# Altium PCB STM32.PcbDoc (part 6 of 6)
Units mm, origin at the board's own origin, x right, y up, seen from the top; angles counter-clockwise.
Board outline 99.69 x 99.7 mm, 2 copper layers (Top Layer, Bottom Layer); 150 components, 142 nets, 668 pads, 273 vias.
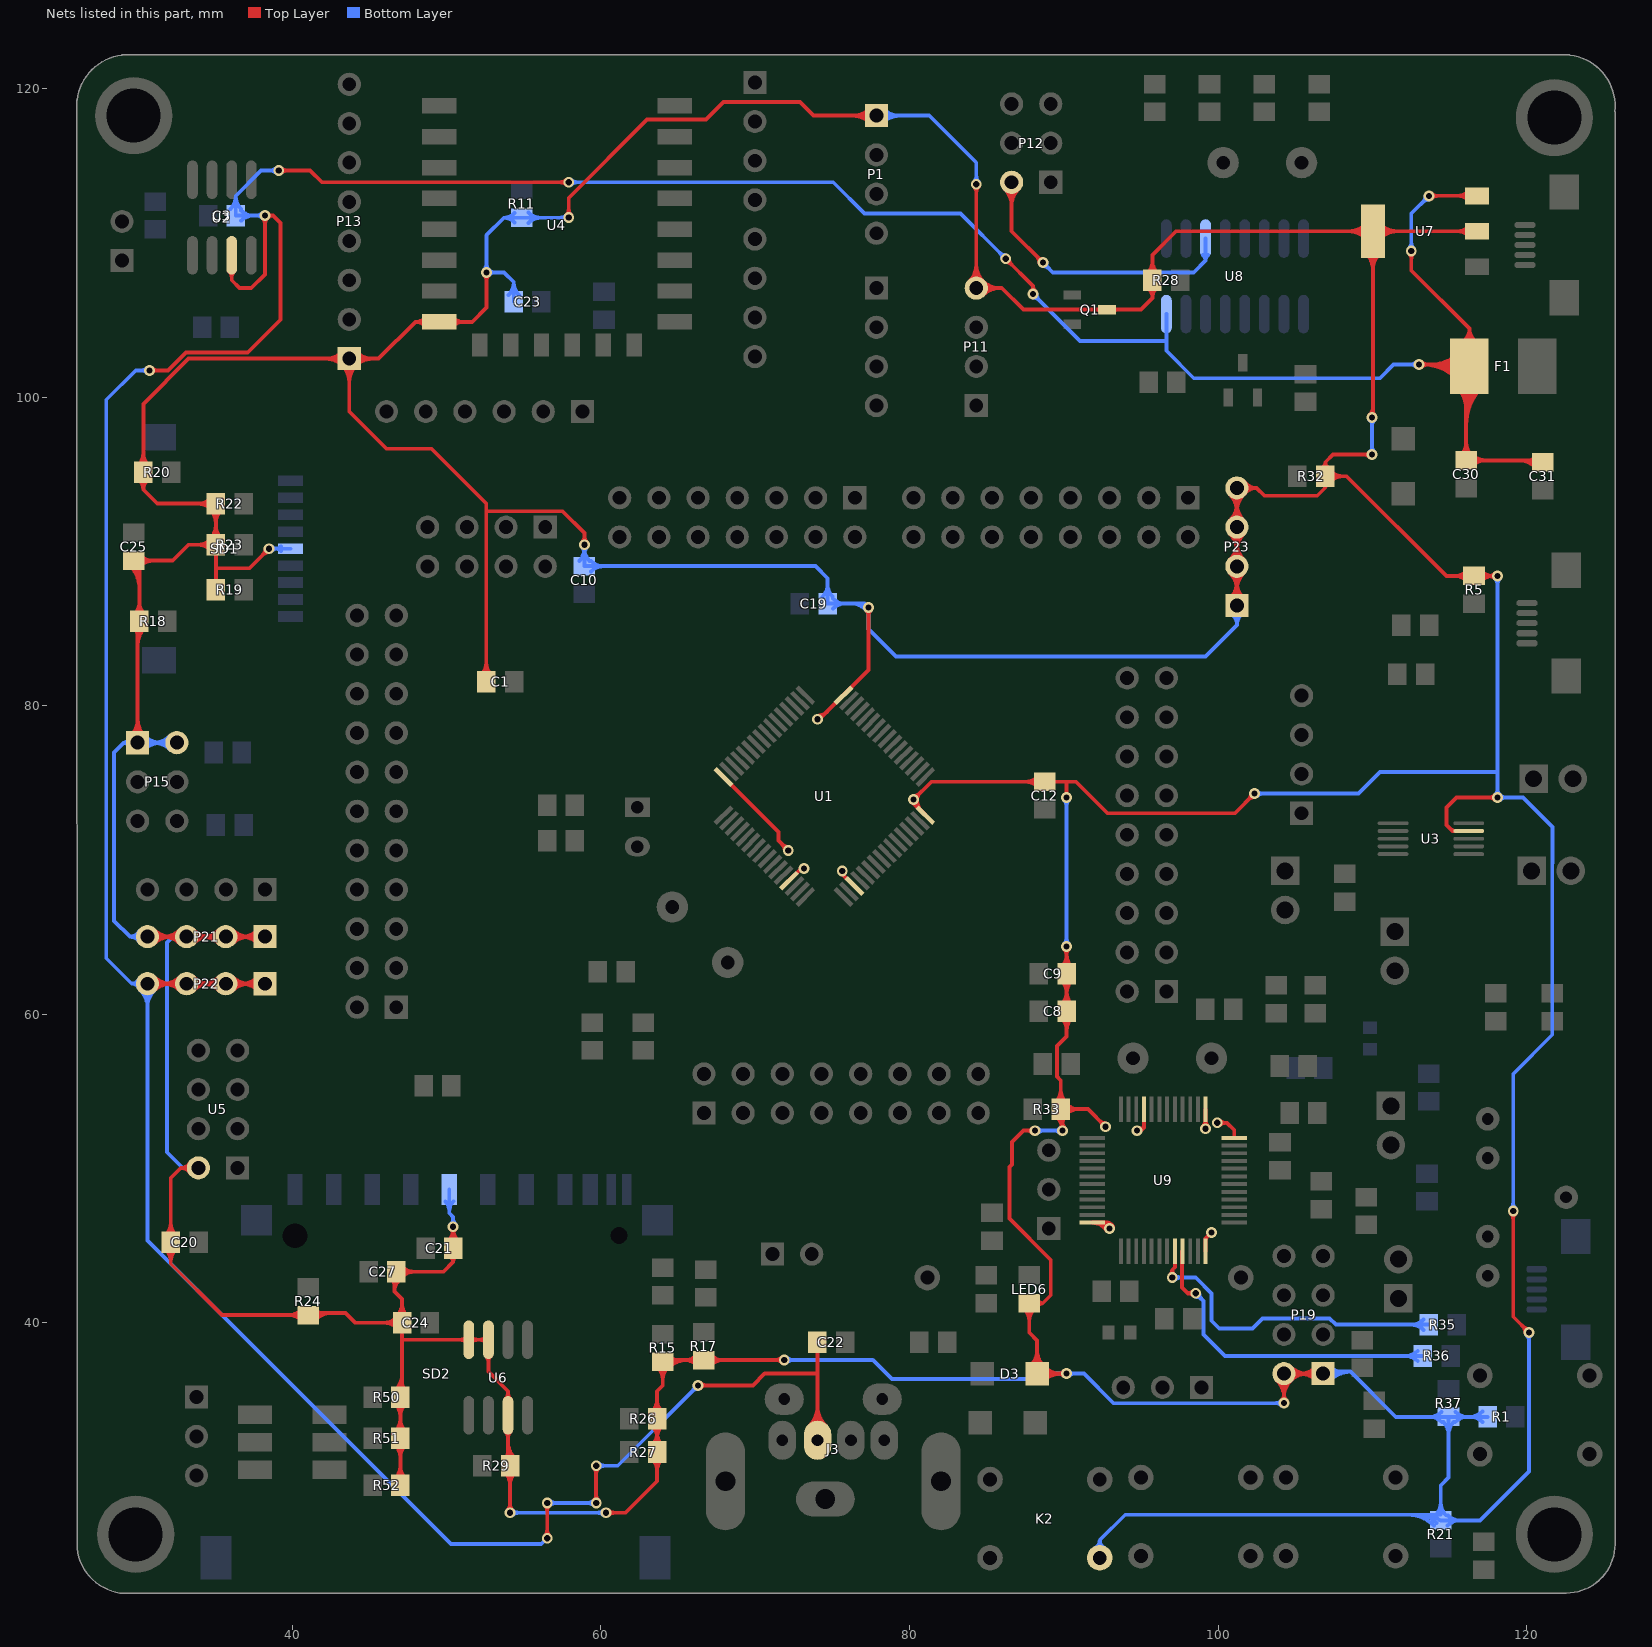
[diagram p6: the nets of this part, all layers, seen from the top]

## Via types
v1: diameter 0.7, hole 0.4, Top Layer to Bottom Layer, 272 vias
v2: diameter 1.27, hole 0.711, Top Layer to Bottom Layer, 1 vias

## Nets (pads, with @x,y where several pads share a name; then routed paths per layer and width w, separated by ;. In a path a pad name is that pad's centre, name@x,y a point inside that pad or via, vN(x,y) a via of type N, cw(c..) or ccw(c..) an arc to the next point about the centre after c; other vN are vias at no path point) (continued)
TXD: P12.2 U8.3 | length 24.9
  Top Layer w0.25: P12.2@86.172,113.477 cw(c85.105,112.41) 86.614,112.41 cw(c88.123,112.41) P12.2@87.056,113.477 ; P12.2@86.349,113.654 cw(c85.709,113.014) 86.614,113.014 cw(c87.519,113.014) P12.2@86.879,113.654 ; P12.2@86.614,113.919 86.614,110.744 v1(88.646,108.712) ; v1@88.421,108.712 ccw(c87.878,108.712) 88.262,109.096 ccw(c88.646,109.48) v1@88.646,108.937
  Bottom Layer w0.25: v1@88.646,108.487 cw(c88.646,107.944) 89.03,108.328 cw(c89.414,108.712) v1@88.871,108.712 ; v1(88.646,108.712) 89.281,108.077 98.425,108.077 99.187,108.839 ; U8.3@99.03,109.212 cw(c98.666,108.839) 99.187,108.839 ; U8.3@99.187,110.273 99.187,108.839 ; U8.3@99.344,109.212 ccw(c99.708,108.839) 99.187,108.839
USB_DM: R35.2 U9.32 | length 24.7
  Top Layer w0.254: v1@96.877,43.09 ccw(c96.561,43.434) 97.028,43.434 ; v1(97.028,42.926) 97.028,43.434 ; v1@97.179,43.09 cw(c97.495,43.434) 97.028,43.434 ; U9.32@97.194,44.637 97.194,43.6 97.028,43.434
  Bottom Layer w0.254: v1(97.028,42.926) 98.552,42.926 99.568,41.91 99.568,40.132 100.076,39.624 102.235,39.624 102.883,40.272 107.233,40.272 107.628,39.878 R35.2@113.654,39.878 ; v1@97.186,42.768 cw(c97.566,42.388) 97.566,42.926 cw(c97.566,43.464) v1@97.186,43.084 ; R35.2@113.32,39.544 ccw(c112.512,38.736) 112.512,39.878 ccw(c112.512,41.02) R35.2@113.32,40.212
USB_DP: R36.2 U9.33 | length 24.4
  Top Layer w0.254: U9.33@97.663,44.606 97.663,42.291 98.044,41.91 ; v1@98.388,41.759 ccw(c98.044,41.443) 98.044,41.91 ; v1@98.388,42.061 cw(c98.044,42.377) 98.044,41.91 ; v1(98.552,41.91) 98.044,41.91
  Bottom Layer w0.254: v1@98.552,41.687 cw(c98.552,41.149) 98.933,41.529 cw(c99.313,41.91) v1@98.775,41.91 ; v1(98.552,41.91) 99.06,41.402 99.06,39.243 100.457,37.846 R36.2@113.273,37.846 ; R36.2@112.939,37.512 ccw(c112.131,36.704) 112.131,37.846 ccw(c112.131,38.988) R36.2@112.939,38.18
VCC: C1.1 C8.2 C9.2 C10.1 C12.1 C19.1 C20.2 C21.1 C23.1 C24.1 C25.1 C27.1 D3.1 K2.1 LED6.1 P1.1 P11.4 P13.1 P15.1 P15.2 P19.1 P19.2 P21.1 P21.2 P21.3 P21.4 P23.1 P23.2 P23.3 P23.4 Q1.3 R1.1 R5.1 R11.1 R15.1 R17.1 R18.1 R19.1 R20.1 R21.1 R22.1 R23.1 R24.1 R26.1 R27.1 R28.2 R29.1 R32.1 R33.2 R37.2 R50.1 R51.1 R52.1 SD1.4 SD2.4 U1.13 U1.19 U1.32 U1.48 U1.64 U3.9 U4.15 U5.2 U6.3 U6.7 U6.8 U7.2 U7.4 U9.1 U9.9 U9.24 U9.36 U9.48 | length 1012
  Top Layer w0.25: C25.1@29.482,89.061 cw(c28.019,87.598) 30.088,87.598 ; P15.1@29.53,78.039 ccw(c28.463,79.106) 29.972,79.106 ccw(c31.481,79.106) P15.1@30.414,78.039 ; C25.1@29.659,89.238 cw(c28.623,88.202) 30.088,88.202 ; P15.1@29.707,77.862 ccw(c29.067,78.502) 29.972,78.502 ccw(c30.877,78.502) P15.1@30.237,77.862 ; R18.1@29.752,85.035 cw(c29.221,84.504) 29.972,84.504 ; R18.1@29.752,85.907 ccw(c28.941,86.718) 30.088,86.718 ccw(c31.235,86.718) R18.1@30.424,85.907 ; C25.1@29.836,89.415 cw(c29.226,88.805) C25.1@30.088,88.805 ; P15.1@29.972,77.597 29.972,85.355 R18.1@30.088,85.471 30.088,89.027 C25.1@29.718,89.397 32.247,89.397 33.274,90.424 R23.1@35.041,90.424 ; 29.972,83.944 cw(c31.515,83.944) R18.1@30.424,85.035 ; 29.972,84.548 cw(c30.911,84.548) R18.1@30.247,85.212 ; R20.1@30.006,95.559 ccw(c29.195,96.37) 30.342,96.37 ccw(c31.489,96.37) R20.1@30.678,95.559 ; R20.1@30.033,94.662 cw(c29.459,93.991) 30.342,93.991 ; C25.1@30.154,89.061 cw(c30.965,88.25) 30.965,89.397 cw(c30.965,90.544) C25.1@30.154,89.733 ; P21.4@30.607,65.024 P21.3@33.147,65.024 P21.2@35.687,65.024 P21.1@38.227,65.024 ; R20.1@30.651,94.662 ccw(c31.226,93.991) 30.342,93.991 ; P21.4@30.872,64.759 cw(c31.512,64.119) 31.512,65.024 cw(c31.512,65.929) P21.4@30.872,65.289 ; P21.4@31.049,64.582 cw(c32.116,63.515) 32.116,65.024 cw(c32.116,66.533) P21.4@31.049,65.466 ; C20.2@31.784,44.776 cw(c30.973,43.965) 32.12,43.965 cw(c33.267,43.965) C20.2@32.456,44.776 ; C20.2@31.784,45.648 ccw(c30.973,46.459) 32.12,46.459 ccw(c33.267,46.459) C20.2@32.456,45.648 ; P21.3@32.705,64.582 ccw(c31.638,63.515) 31.638,65.024 ccw(c31.638,66.533) P21.3@32.705,65.466 ; P21.3@32.882,64.759 ccw(c32.242,64.119) 32.242,65.024 ccw(c32.242,65.929) P21.3@32.882,65.289 ; U5.2@33.383,49.701 ccw(c32.766,49.305) 32.766,50.038 ; U5.2@33.383,50.375 cw(c32.766,50.771) 32.766,50.038 ; P21.3@33.412,64.759 cw(c34.052,64.119) 34.052,65.024 cw(c34.052,65.929) P21.3@33.412,65.289 ; P21.3@33.589,64.582 cw(c34.656,63.515) 34.656,65.024 cw(c34.656,66.533) P21.3@33.589,65.466 ; U5.2@33.909,50.038 32.766,50.038 ; R23.1@34.705,90.088 ccw(c33.894,89.277) 33.894,90.424 ccw(c33.894,91.571) R23.1@34.705,90.76 ; R23.1@34.705,90.86 ccw(c33.894,91.671) 35.041,91.671 ccw(c36.188,91.671) R23.1@35.377,90.86 ; R22.1@34.705,92.655 cw(c33.894,91.844) 35.041,91.844 cw(c36.188,91.844) R22.1@35.377,92.655 ; R22.1@34.705,92.755 ccw(c33.894,91.944) 33.894,93.091 ccw(c33.894,94.238) R22.1@34.705,93.427 ; R19.1@35.041,87.503 35.041,88.9 ; P21.2@35.245,64.582 ccw(c34.178,63.515) 34.178,65.024 ccw(c34.178,66.533) P21.2@35.245,65.466 ; P21.2@35.422,64.759 ccw(c34.782,64.119) 34.782,65.024 ccw(c34.782,65.929) P21.2@35.422,65.289 ; P21.2@35.952,64.759 cw(c36.592,64.119) 36.592,65.024 cw(c36.592,65.929) P21.2@35.952,65.289 ; P21.2@36.129,64.582 cw(c37.196,63.515) 37.196,65.024 cw(c37.196,66.533) P21.2@36.129,65.466 ; P21.1@37.785,64.582 ccw(c36.718,63.515) 36.718,65.024 ccw(c36.718,66.533) P21.1@37.785,65.466 ; P21.1@37.962,64.759 ccw(c37.322,64.119) 37.322,65.024 ccw(c37.322,65.929) P21.1@37.962,65.289 ; v1@38.256,90.17 cw(c37.713,90.17) 38.097,89.786 cw(c38.481,89.402) v1@38.481,89.945 ; v1(38.481,90.17) 37.211,88.9 35.041,88.9 ; R24.1@40.585,40.166 ccw(c39.774,39.355) 39.774,40.502 ccw(c39.774,41.649) R24.1@40.585,40.838 ; R24.1@41.28,40.343 cw(c41.997,39.626) 41.997,40.64 ; R24.1@41.457,40.166 cw(c42.601,39.022) 42.601,40.64 ; R24.1@41.457,40.838 ccw(c41.935,41.316) 41.935,40.64 ; P13.1@43.246,102.931 cw(c42.179,103.998) 42.179,102.489 cw(c42.179,100.98) 43.246,102.047 cw(c42.179,100.98) 43.688,100.98 cw(c45.197,100.98) 44.13,102.047 cw(c45.197,100.98) 45.197,102.489 cw(c45.197,103.998) P13.1@44.13,102.931 ; P13.1@43.423,102.754 cw(c42.783,103.394) 42.783,102.489 cw(c42.783,101.584) 43.423,102.224 cw(c42.783,101.584) 43.688,101.584 cw(c44.593,101.584) 43.953,102.224 cw(c44.593,101.584) 44.593,102.489 cw(c44.593,103.394) P13.1@43.953,102.754 ; C27.1@46.411,42.871 cw(c45.933,42.393) 46.609,42.393 ; 46.609,42.029 cw(c47.573,42.029) C27.1@47.02,42.818 ; 46.609,42.509 cw(c47.236,42.509) C27.1@46.876,43.023 ; R52.1@46.665,29.9 ccw(c45.854,30.711) 47.001,30.711 ccw(c48.148,30.711) R52.1@47.337,29.9 ; R51.1@46.665,32.076 cw(c45.854,31.265) 47.001,31.265 cw(c48.148,31.265) R51.1@47.337,32.076 ; R51.1@46.665,32.948 ccw(c45.854,33.759) 47.001,33.759 ccw(c48.148,33.759) R51.1@47.337,32.948 ; R50.1@46.665,34.743 cw(c45.854,33.932) 47.001,33.932 cw(c48.148,33.932) R50.1@47.337,34.743 ; R50.1@46.665,35.615 ccw(c45.601,36.679) 47.106,36.679 ; C24.1@46.77,39.669 ccw(c45.959,38.858) 45.959,40.005 ccw(c45.959,41.152) C24.1@46.77,40.341 ; C24.1@46.77,40.441 ccw(c45.959,41.252) 47.106,41.252 ccw(c48.253,41.252) C24.1@47.442,40.441 ; R50.1@46.842,35.438 ccw(c46.204,36.076) 47.106,36.076 ; R52.1@47.001,29.464 R51.1@47.001,32.512 R50.1@47.001,35.179 47.106,35.284 47.106,38.862 ; C27.1@47.083,42.971 cw(c47.894,42.16) 47.894,43.307 cw(c47.894,44.454) C27.1@47.083,43.643 ; 47.106,36.172 ccw(c47.894,36.172) R50.1@47.337,35.615 ; 47.106,39.254 47.106,38.862 ; U4.15@48.634,104.607 ccw(c47.994,103.967) 47.994,104.872 ccw(c47.994,105.777) U4.15@48.634,105.137 ; C21.1@50.094,45.267 ccw(c49.283,46.078) 50.43,46.078 ccw(c51.577,46.078) C21.1@50.766,45.267 ; C21.1@50.199,44.316 cw(c49.991,43.942) 50.419,43.942 ; v1@50.26,46.069 cw(c49.849,45.658) 50.43,45.658 ; U4.15@50.414,104.607 cw(c51.054,103.967) 51.054,104.872 cw(c51.054,105.777) U4.15@50.414,105.137 ; 50.43,45.711 cw(c50.936,45.711) v1@50.578,46.069 ; v1@50.43,46.217 C21.1@50.43,44.831 50.419,44.82 50.419,43.942 ; C21.1@50.644,44.307 ccw(c50.828,43.942) 50.419,43.942 ; U6.8@51.276,38.74 ccw(c50.892,38.356) 50.892,38.899 ccw(c50.892,39.442) U6.8@51.276,39.058 ; U6.8@51.594,38.74 cw(c51.978,38.356) 51.978,38.899 cw(c51.978,39.442) U6.8@51.594,39.058 ; C1.1@52.231,81.97 ccw(c51.42,82.781) 52.567,82.781 ccw(c53.714,82.781) C1.1@52.903,81.97 ; v1@52.419,107.918 cw(c52.035,107.534) 52.578,107.534 cw(c53.121,107.534) v1@52.737,107.918 ; U6.7@52.546,37.84 cw(c52.162,37.456) 52.705,37.456 cw(c53.248,37.456) U6.7@52.864,37.84 ; U6.7@52.546,38.74 ccw(c52.162,38.356) 52.162,38.899 ccw(c52.162,39.442) U6.7@52.546,39.058 ; C1.1@52.567,81.534 52.567,92.583 ; v1(52.578,108.077) 52.578,105.791 51.659,104.872 U4.15@49.524,104.872 47.976,104.872 45.593,102.489 P13.1@43.688,102.489 ; R29.1@53.777,30.298 cw(c52.993,29.514) 54.102,29.514 ; R29.1@53.777,31.17 ccw(c53.299,31.648) 53.975,31.648 ; U6.3@53.816,32.94 cw(c53.432,32.556) 53.975,32.556 cw(c54.518,32.556) U6.3@54.134,32.94 ; U6.3@53.816,35.058 ccw(c53.432,35.442) 53.975,35.442 ccw(c54.518,35.442) U6.3@54.134,35.058 ; v1@53.943,27.845 ccw(c53.559,28.229) 54.102,28.229 ccw(c54.645,28.229) v1@54.261,27.845 ; 53.975,31.71 ccw(c54.989,31.71) R29.1@54.272,30.993 ; 53.975,32.314 ccw(c55.593,32.314) R29.1@54.449,31.17 ; v1(54.102,27.686) 54.102,30.723 R29.1@54.113,30.734 53.975,30.872 U6.3@53.975,33.999 53.975,35.56 52.705,36.83 U6.7@52.705,38.899 U6.8@51.435,38.899 47.143,38.899 47.106,38.862 ; 54.102,29.461 cw(c55.286,29.461) R29.1@54.449,30.298 ; v1@57.753,111.792 ccw(c57.369,112.176) 57.912,112.176 ccw(c58.455,112.176) v1@58.071,111.792 ; v1(57.912,111.633) 57.912,112.903 62.992,117.983 66.802,117.983 67.945,119.126 72.898,119.126 73.787,118.237 P1.1@77.851,118.237 ; v1@58.769,90.583 ccw(c58.385,90.967) 58.928,90.967 ccw(c59.471,90.967) v1@59.087,90.583 ; v1(58.928,90.424) 58.928,91.186 57.52,92.594 52.578,92.594 52.567,92.583 ; v1(60.325,27.686) 61.595,27.686 63.638,29.729 R27.1@63.638,31.623 R26.1@63.638,33.782 63.627,33.793 63.627,35.56 64.008,35.941 R15.1@64.008,37.465 64.124,37.581 R17.1@66.675,37.581 71.871,37.581 v1(71.882,37.592) ; v1@60.484,27.527 cw(c60.868,27.143) 60.868,27.686 cw(c60.868,28.229) v1@60.484,27.845 ; R27.1@63.302,31.187 cw(c62.491,30.376) 63.638,30.376 cw(c64.785,30.376) R27.1@63.974,31.187 ; R27.1@63.302,32.059 ccw(c62.491,32.87) 63.638,32.87 ccw(c64.785,32.87) R27.1@63.974,32.059 ; R26.1@63.302,33.346 cw(c62.491,32.535) 63.638,32.535 cw(c64.785,32.535) R26.1@63.974,33.346 ; R26.1@63.302,34.218 ccw(c62.518,35.002) 63.627,35.002 ; 63.627,35.055 ccw(c64.811,35.055) R26.1@63.974,34.218 ; R15.1@63.672,37.129 cw(c62.861,36.318) 64.008,36.318 cw(c65.155,36.318) R15.1@64.344,37.129 ; R15.1@64.267,37.306 cw(c64.931,36.642) 64.931,37.581 ; R15.1@64.444,37.129 cw(c65.535,36.038) 65.535,37.581 ; R15.1@64.444,37.801 ccw(c64.975,38.332) 64.975,37.581 ; R17.1@66.239,37.245 ccw(c65.428,36.434) 65.428,37.581 ccw(c65.428,38.728) R17.1@66.239,37.917 ; R17.1@67.111,37.245 cw(c67.922,36.434) 67.922,37.581 cw(c67.922,38.728) R17.1@67.111,37.917 ; U1.64@67.945,75.373 71.501,71.817 71.501,71.247 v1(72.136,70.612) ; 71.312,37.581 ccw(c71.312,38.162) v1@71.723,37.751 ; 71.365,37.581 cw(c71.365,37.075) v1@71.723,37.433 ; v1@71.911,70.612 ccw(c71.368,70.612) 71.752,70.996 ccw(c72.136,71.38) v1@72.136,70.837 ; U1.13@72.188,68.655 72.983,69.451 v1(73.163,69.451) ; v1(74.041,79.121) 74.168,79.121 U1.48@75.723,80.676 77.343,82.296 v1(77.343,86.36) ; v1@74.041,79.346 ccw(c74.041,80.196) 74.642,79.595 ; v1(75.635,69.277) 75.635,69.097 U1.19@76.43,68.302 ; v1@77.184,86.201 cw(c76.8,85.817) 77.343,85.817 cw(c77.886,85.817) v1@77.502,86.201 ; P1.1@77.409,117.795 ccw(c76.342,116.728) 76.342,118.237 ccw(c76.342,119.746) P1.1@77.409,118.679 ; P1.1@77.586,117.972 ccw(c76.946,117.332) 76.946,118.237 ccw(c76.946,119.142) P1.1@77.586,118.502 ; v1@80.239,73.914 ccw(c80.791,73.914) 80.401,73.524 ; v1@80.264,74.139 ccw(c80.264,74.682) 80.648,74.298 ccw(c81.032,73.914) 80.489,73.914 ccw(c81.644,73.914) U1.32@80.827,73.097 ; U1.32@81.027,72.898 80.264,73.661 v1(80.264,73.914) 81.418,75.068 C12.1@88.773,75.068 90.17,75.068 ; P11.4@83.886,107.503 ccw(c82.819,108.57) 84.328,108.57 ccw(c85.837,108.57) 84.77,107.503 ccw(c85.837,108.57) 85.837,107.061 ccw(c85.837,105.552) P11.4@84.77,106.619 ; P11.4@84.063,107.326 ccw(c83.423,107.966) 84.328,107.966 ccw(c85.233,107.966) 84.593,107.326 ccw(c85.233,107.966) 85.233,107.061 ccw(c85.233,106.156) P11.4@84.593,106.796 ; v1@84.169,113.633 cw(c83.785,113.249) 84.328,113.249 cw(c84.871,113.249) v1@84.487,113.633 ; v1(84.328,113.792) P11.4@84.328,107.061 85.979,107.061 87.376,105.664 Q1.3@92.801,105.664 94.996,105.664 95.747,106.415 ; LED6.1@87.421,40.928 cw(c86.61,40.117) 87.757,40.117 cw(c88.904,40.117) LED6.1@88.093,40.928 ; D3.1@87.815,37.153 ccw(c86.727,38.241) 88.265,38.241 ccw(c89.803,38.241) 88.715,37.153 ccw(c89.803,38.241) 89.803,36.703 ccw(c89.803,35.165) D3.1@88.715,36.253 ; v1@87.979,52.292 ccw(c87.595,51.908) 87.595,52.451 ccw(c87.595,52.994) v1@87.979,52.61 ; D3.1@87.991,36.977 ccw(c87.331,37.637) 88.265,37.637 ccw(c89.199,37.637) 88.539,36.977 ccw(c89.199,37.637) 89.199,36.703 ccw(c89.199,35.769) D3.1@88.539,36.429 ; v1(88.138,52.451) 87.378,52.451 86.635,51.709 86.635,50.251 86.469,50.085 86.469,46.754 89.154,44.069 89.154,41.783 88.635,41.264 ; LED6.1@88.28,41.047 cw(c88.635,40.864) 88.635,41.264 ; LED6.1@88.28,41.481 ccw(c88.635,41.664) 88.635,41.264 ; C12.1@88.337,74.732 ccw(c87.526,73.921) 87.526,75.068 ccw(c87.526,76.215) C12.1@88.337,75.404 ; R33.2@89.464,54.284 ccw(c88.653,55.095) 89.8,55.095 ccw(c90.947,55.095) R33.2@90.136,54.284 ; R33.2@89.487,53.39 cw(c88.661,52.446) v1@89.916,52.446 ; R33.2@89.652,53.579 cw(c89.143,52.997) 89.916,52.997 ; v1@89.757,52.61 ccw(c89.373,52.994) 89.916,52.994 ccw(c90.459,52.994) v1@90.075,52.61 ; v1@89.8,52.567 v1(89.916,52.451) R33.2@89.916,53.732 ; C8.2@89.845,59.762 cw(c89.034,58.951) 90.181,58.951 cw(c91.328,58.951) C8.2@90.517,59.762 ; C8.2@89.845,60.634 ccw(c89.034,61.445) 90.181,61.445 ccw(c91.328,61.445) C8.2@90.517,60.634 ; C9.2@89.845,62.175 cw(c89.034,61.364) 90.181,61.364 cw(c91.328,61.364) C9.2@90.517,62.175 ; C9.2@89.845,63.047 ccw(c89.034,63.858) 90.181,63.858 ccw(c91.328,63.858) C9.2@90.517,63.047 ; 89.916,52.881 cw(c90.667,52.881) R33.2@90.136,53.412 ; v1@90.011,36.544 ccw(c89.627,36.16) 89.627,36.703 ccw(c89.627,37.246) v1@90.011,36.862 ; v1@90.011,64.23 cw(c89.6,63.819) 90.181,63.819 ; R33.2@90.136,53.512 cw(c90.947,52.701) 90.947,53.848 cw(c90.947,54.995) R33.2@90.136,54.184 ; v1(90.17,36.703) D3.1@88.265,36.703 88.265,38.862 87.757,39.37 LED6.1@87.757,41.264 88.635,41.264 ; v1(90.17,64.389) 90.181,64.378 C9.2@90.181,62.611 C8.2@90.181,60.198 90.181,58.558 89.558,57.935 89.558,55.954 89.8,55.712 R33.2@89.8,53.848 91.567,53.848 v1(92.71,52.705) ; v1(90.17,74.041) 90.17,75.068 ; 90.181,63.872 cw(c90.687,63.872) v1@90.329,64.23 ; U9.24@92.302,46.487 cw(c92.302,45.676) v1@92.985,46.115 ; Q1.3@92.402,105.54 ccw(c92.104,105.242) 92.104,105.664 ccw(c92.104,106.086) Q1.3@92.402,105.788 ; v1@92.485,52.705 ccw(c91.942,52.705) 92.326,53.089 ccw(c92.71,53.473) v1@92.71,52.93 ; 92.76,46.487 cw(c92.76,45.97) v1@93.195,46.25 ; v1@92.775,45.979 ccw(c91.844,45.381) U9.24@91.844,46.487 92.832,46.487 92.964,46.355 v1(92.964,46.101) ; Q1.3@93.2,105.54 cw(c93.499,105.242) 93.499,105.664 cw(c93.499,106.086) Q1.3@93.2,105.788 ; v1(94.742,52.451) 94.996,52.451 95.194,52.649 ; v1@94.879,52.629 ccw(c95.025,52.818) 95.194,52.649 ; U9.9@95.194,53.837 95.194,52.649 ; R28.2@95.411,108.005 ccw(c94.6,108.816) 95.747,108.816 ccw(c96.894,108.816) R28.2@96.083,108.005 ; R28.2@95.432,107.113 cw(c94.815,106.415) 95.747,106.415 ; R28.2@96.062,107.113 ccw(c96.679,106.415) 95.747,106.415 ; v1@99.028,52.737 ccw(c98.644,53.121) 99.187,53.121 ccw(c99.73,53.121) v1@99.346,52.737 ; v1(99.187,52.578) U9.1@99.187,53.83 ; U9.36@99.194,44.637 99.194,45.473 v1(99.568,45.847) ; U9.36@99.196,45.336 cw(c99.534,45.336) 99.295,45.574 ; v1(99.949,52.959) 100.584,52.959 101.044,52.499 U9.48@101.044,51.987 ; v1@100.108,52.8 cw(c100.492,52.416) 100.492,52.959 cw(c100.492,53.502) v1@100.108,53.118 ; P23.1@100.777,86.929 ccw(c99.71,87.996) 101.219,87.996 ccw(c102.728,87.996) P23.1@101.661,86.929 ; P23.2@100.777,88.585 cw(c99.71,87.518) 101.219,87.518 cw(c102.728,87.518) P23.2@101.661,88.585 ; P23.2@100.777,89.469 ccw(c99.71,90.536) 101.219,90.536 ccw(c102.728,90.536) P23.2@101.661,89.469 ; P23.3@100.777,91.125 cw(c99.71,90.058) 101.219,90.058 cw(c102.728,90.058) P23.3@101.661,91.125 ; P23.3@100.777,92.009 ccw(c99.71,93.076) 101.219,93.076 ccw(c102.728,93.076) P23.3@101.661,92.009 ; P23.4@100.777,93.665 cw(c99.71,92.598) 101.219,92.598 cw(c102.728,92.598) P23.4@101.661,93.665 ; P23.1@100.954,86.752 ccw(c100.314,87.392) 101.219,87.392 ccw(c102.124,87.392) P23.1@101.484,86.752 ; P23.2@100.954,88.762 cw(c100.314,88.122) 101.219,88.122 cw(c102.124,88.122) P23.2@101.484,88.762 ; P23.2@100.954,89.292 ccw(c100.314,89.932) 101.219,89.932 ccw(c102.124,89.932) P23.2@101.484,89.292 ; P23.3@100.954,91.302 cw(c100.314,90.662) 101.219,90.662 cw(c102.124,90.662) P23.3@101.484,91.302 ; P23.3@100.954,91.832 ccw(c100.314,92.472) 101.219,92.472 ccw(c102.124,92.472) P23.3@101.484,91.832 ; P23.4@100.954,93.842 cw(c100.314,93.202) 101.219,93.202 cw(c102.124,93.202) P23.4@101.484,93.842 ; P23.1@101.219,86.487 P23.2@101.219,89.027 P23.3@101.219,91.567 P23.4@101.219,94.107 102.489,94.107 ; P23.4@101.516,93.878 cw(c101.981,93.52) 101.981,94.107 cw(c101.981,94.694) P23.4@101.516,94.336 ; P23.4@101.714,93.726 cw(c102.489,93.129) 102.489,94.107 ; P23.4@101.714,94.488 ccw(c102.489,95.085) 102.489,94.107 ; v1@102.137,74.295 cw(c101.594,74.295) 101.978,73.911 cw(c102.362,73.527) v1@102.362,74.07 ; v1(102.362,74.295) 101.092,73.025 92.837,73.025 90.794,75.068 90.17,75.068 ; P19.2@103.825,36.261 cw(c102.758,35.194) 104.267,35.194 cw(c105.776,35.194) 104.709,36.261 cw(c105.776,35.194) 105.776,36.703 cw(c105.776,38.212) P19.2@104.709,37.145 ; P19.2@104.002,36.438 cw(c103.362,35.798) 104.267,35.798 cw(c105.172,35.798) 104.532,36.438 cw(c105.172,35.798) 105.172,36.703 cw(c105.172,37.608) P19.2@104.532,36.968 ; v1@104.108,34.957 ccw(c103.724,35.341) 104.267,35.341 ccw(c104.81,35.341) v1@104.426,34.957 ; v1(104.267,34.798) P19.2@104.267,36.703 P19.1@106.807,36.703 ; P19.1@106.365,36.261 ccw(c105.298,35.194) 105.298,36.703 ccw(c105.298,38.212) P19.1@106.365,37.145 ; P19.1@106.542,36.438 ccw(c105.902,35.798) 105.902,36.703 ccw(c105.902,37.608) P19.1@106.542,36.968 ; R32.1@106.718,95.386 ccw(c106.509,95.769) 106.945,95.769 ; R32.1@106.8,94.317 cw(c106.736,94.118) 106.945,94.118 ; R32.1@107.09,94.317 ccw(c107.154,94.118) 106.945,94.118 ; R32.1@107.172,95.386 cw(c107.381,95.769) 106.945,95.769 ; R32.1@107.281,94.533 cw(c108.092,93.722) 108.092,94.869 cw(c108.092,96.016) R32.1@107.281,95.205 ; U7.4@109.576,109.334 cw(c108.467,108.225) 110.036,108.225 cw(c111.605,108.225) U7.4@110.496,109.334 ; U7.4@109.576,110.284 ccw(c108.467,109.175) 108.467,110.744 ccw(c108.467,112.313) U7.4@109.576,111.204 ; U7.4@109.753,109.511 cw(c109.07,108.828) 110.036,108.828 cw(c111.002,108.828) U7.4@110.319,109.511 ; U7.4@109.753,110.461 ccw(c109.07,109.778) 109.07,110.744 ccw(c109.07,111.71) U7.4@109.753,111.027 ; v1@109.823,96.107 ccw(c109.439,95.723) 109.439,96.266 ccw(c109.439,96.809) v1@109.823,96.425 ; v1@109.823,98.838 ccw(c109.308,99.353) 110.036,99.353 ; v1(109.982,96.266) 107.442,96.266 106.945,95.769 ; v1(109.982,98.679) 110.036,98.733 U7.4@110.036,110.744 ; 110.036,99.092 ccw(c110.395,99.092) v1@110.141,98.838 ; U7.4@110.319,110.461 cw(c111.002,109.778) 111.002,110.744 cw(c111.002,111.71) U7.4@110.319,111.027 ; U7.4@110.496,110.284 cw(c111.605,109.175) 111.605,110.744 cw(c111.605,112.313) U7.4@110.496,111.204 ; 115.077,71.994 ccw(c115.367,72.284) U3.9@115.367,71.874 ; R5.1@116.15,88.067 ccw(c115.339,87.256) 115.339,88.403 ccw(c115.339,89.55) R5.1@116.15,88.739 ; U3.9@116.242,71.874 115.197,71.874 114.808,72.263 114.808,73.406 115.443,74.041 v1(118.11,74.041) ; U7.2@116.26,110.443 ccw(c115.535,109.718) 115.535,110.744 ccw(c115.535,111.77) U7.2@116.26,111.045 ; U7.2@116.786,110.744 U7.4@110.036,110.744 ; R5.1@117.022,88.067 cw(c117.833,87.256) 117.833,88.403 cw(c117.833,89.55) R5.1@117.022,88.739 ; 117.54,88.403 cw(c117.54,87.822) v1@117.951,88.233 ; 117.593,88.403 ccw(c117.593,88.909) v1@117.951,88.551 ; v1@117.951,73.882 ccw(c117.567,73.498) 117.567,74.041 ccw(c117.567,74.584) v1@117.951,74.2 ; v1(118.11,88.392) 118.099,88.403 R5.1@116.586,88.403 114.797,88.403 108.331,94.869 R32.1@106.945,94.869 ; v1@118.967,47.085 cw(c118.583,46.701) 119.126,46.701 cw(c119.669,46.701) v1@119.285,47.085 ; v1(119.126,47.244) 119.126,40.386 v1(120.142,39.37) ; v1@119.917,39.37 ccw(c119.374,39.37) 119.758,39.754 ccw(c120.142,40.138) v1@120.142,39.595 ; 30.342,93.991 R20.1@30.342,95.123 30.342,99.557 33.274,102.489 P13.1@43.688,102.489 ; 30.342,93.991 31.242,93.091 R22.1@35.041,93.091 R23.1@35.041,90.424 ; 32.766,50.038 32.12,49.392 C20.2@32.12,45.212 32.12,43.826 35.444,40.502 R24.1@41.021,40.502 41.159,40.64 43.434,40.64 44.069,40.005 C24.1@47.106,40.005 47.106,41.54 46.609,42.037 46.609,43.169 C27.1@46.747,43.307 49.784,43.307 50.419,43.942 ; 35.041,88.9 R23.1@35.041,90.424 ; P13.1@43.688,102.489 43.688,99.06 46.101,96.647 49.022,96.647 52.567,93.102 52.567,92.583 ; 95.747,106.415 R28.2@95.747,107.569 95.747,109.209 97.282,110.744 U7.4@110.036,110.744 ; 102.489,94.107 102.997,93.599 106.426,93.599 106.945,94.118 ; 106.945,94.118 R32.1@106.945,94.869 ; R32.1@106.945,94.869 106.945,95.769
  Bottom Layer w0.25: P15.1@29.384,77.385 ccw(c29.083,77.277) 29.083,77.597 ; P15.1@29.384,77.808 cw(c29.083,77.917) 29.083,77.597 ; P21.4@30.081,64.687 ccw(c29.464,64.291) 29.464,65.024 ; P21.4@30.081,65.361 cw(c29.464,65.757) 29.464,65.024 ; P15.1@30.237,77.332 cw(c30.877,76.692) 30.877,77.597 cw(c30.877,78.502) P15.1@30.237,77.862 ; P15.1@30.414,77.155 cw(c31.481,76.088) 31.481,77.597 cw(c31.481,79.106) P15.1@30.414,78.039 ; P21.4@30.607,65.024 29.464,65.024 ; P15.2@32.07,77.155 ccw(c31.003,76.088) 31.003,77.597 ccw(c31.003,79.106) P15.2@32.07,78.039 ; P15.2@32.247,77.332 ccw(c31.607,76.692) 31.607,77.597 ccw(c31.607,78.502) P15.2@32.247,77.862 ; P15.2@32.512,77.597 P15.1@29.972,77.597 29.083,77.597 ; P21.3@32.559,64.812 ccw(c32.258,64.704) 32.258,65.024 ; P21.3@32.559,65.236 cw(c32.258,65.344) 32.258,65.024 ; P21.3@33.147,65.024 32.258,65.024 ; U5.2@33.351,49.756 ccw(c32.893,49.525) 32.893,50.038 ; U5.2@33.351,50.32 cw(c32.893,50.551) 32.893,50.038 ; U5.2@33.909,50.038 32.893,50.038 ; v1(38.481,90.17) SD1.4@39.878,90.17 ; v1@38.64,90.011 cw(c39.024,89.627) 39.024,90.17 cw(c39.024,90.713) v1@38.64,90.329 ; SD1.4@39.269,90.011 ccw(c38.885,89.627) 38.885,90.17 ccw(c38.885,90.713) SD1.4@39.269,90.329 ; SD2.4@49.907,47.876 cw(c49.284,47.253) 50.165,47.253 ; 50.165,47.219 cw(c51.094,47.219) SD2.4@50.437,47.876 ; SD2.4@50.172,48.641 50.165,48.634 50.165,47.117 50.419,46.863 v1(50.419,46.228) ; v1@50.26,46.387 ccw(c49.876,46.771) 50.419,46.771 ccw(c50.962,46.771) v1@50.578,46.387 ; v1@52.419,108.236 ccw(c52.035,108.62) 52.578,108.62 ccw(c53.121,108.62) 52.737,108.236 ccw(c53.121,108.62) 53.121,108.077 ccw(c53.121,107.534) v1@52.737,107.918 ; C23.1@54.009,106.608 ccw(c53.198,107.419) 54.345,107.419 ccw(c55.492,107.419) C23.1@54.681,106.608 ; v1(54.102,27.686) v1(60.325,27.686) ; v1@54.261,27.527 cw(c54.645,27.143) 54.645,27.686 cw(c54.645,28.229) v1@54.261,27.845 ; C23.1@54.345,106.172 54.345,107.453 53.721,108.077 v1(52.578,108.077) 52.578,110.49 53.71,111.622 ; R11.1@54.408,111.307 ccw(c53.71,110.69) 53.71,111.622 ; R11.1@54.408,111.937 cw(c53.71,112.554) 53.71,111.622 ; R11.1@55.3,111.286 cw(c56.111,110.475) 56.111,111.622 cw(c56.111,112.769) R11.1@55.3,111.958 ; 57.342,111.622 ccw(c57.342,112.203) v1@57.753,111.792 ; 57.395,111.622 cw(c57.395,111.116) v1@57.753,111.474 ; v1(57.912,111.633) 57.901,111.622 R11.1@54.864,111.622 53.71,111.622 ; C10.1@58.592,89.374 ccw(c57.781,90.185) v1@58.928,90.185 ; v1@58.769,90.265 cw(c58.385,89.881) 58.928,89.881 cw(c59.471,89.881) v1@59.087,90.265 ; v1@58.928,90.185 ccw(c60.075,90.185) C10.1@59.264,89.374 ; v1(58.928,90.424) C10.1@58.928,89.038 73.903,89.038 74.687,88.254 C19.1@74.687,86.614 77.089,86.614 v1(77.343,86.36) 77.343,84.963 79.121,83.185 99.187,83.185 101.219,85.217 ; C10.1@59.364,88.702 cw(c60.175,87.891) 60.175,89.038 cw(c60.175,90.185) C10.1@59.364,89.374 ; v1@60.166,27.527 ccw(c59.782,27.143) 59.782,27.686 ccw(c59.782,28.229) v1@60.166,27.845 ; v1(71.882,37.592) 77.62,37.592 78.867,36.345 87.907,36.345 88.265,36.703 v1(90.17,36.703) 91.313,36.703 93.229,34.787 104.256,34.787 v1(104.267,34.798) ; v1@72.041,37.433 cw(c72.425,37.049) 72.425,37.592 cw(c72.425,38.135) v1@72.041,37.751 ; v1@73.054,69.342 v1(73.163,69.451) ; C19.1@74.351,87.05 ccw(c73.54,87.861) 74.687,87.861 ccw(c75.834,87.861) C19.1@75.023,87.05 ; C19.1@75.023,86.278 cw(c75.834,85.467) 75.834,86.614 cw(c75.834,87.761) C19.1@75.023,86.95 ; v1@75.63,69.277 v1(75.635,69.277) ; 76.186,86.614 cw(c76.186,85.203) 77.184,86.201 cw(c76.8,85.817) 77.343,85.817 cw(c77.886,85.817) v1@77.502,86.201 ; 76.79,86.614 cw(c76.79,85.807) v1@77.361,86.378 ; P1.1@77.851,118.237 81.28,118.237 84.328,115.189 v1(84.328,113.792) ; P1.1@78.116,117.972 cw(c78.756,117.332) 78.756,118.237 cw(c78.756,119.142) P1.1@78.116,118.502 ; P1.1@78.293,117.795 cw(c79.36,116.728) 79.36,118.237 cw(c79.36,119.746) P1.1@78.293,118.679 ; v1@84.169,113.951 ccw(c83.785,114.335) 84.328,114.335 ccw(c84.871,114.335) v1@84.487,113.951 ; v1(88.138,52.451) v1(89.916,52.451) ; v1@88.297,52.292 cw(c88.681,51.908) 88.681,52.451 cw(c88.681,52.994) v1@88.297,52.61 ; v1@89.757,52.292 ccw(c89.373,51.908) 89.373,52.451 ccw(c89.373,52.994) v1@89.757,52.61 ; v1@90.011,36.544 ccw(c89.627,36.16) 89.627,36.703 ccw(c89.627,37.246) v1@90.011,36.862 ; v1@90.011,64.548 ccw(c89.627,64.932) 90.17,64.932 ccw(c90.713,64.932) v1@90.329,64.548 ; v1@90.011,73.882 cw(c89.627,73.498) 90.17,73.498 cw(c90.713,73.498) v1@90.329,73.882 ; v1(90.17,64.389) v1(90.17,74.041) ; v1@90.329,36.544 cw(c90.713,36.16) 90.713,36.703 cw(c90.713,37.246) v1@90.329,36.862 ; K2.1@92.011,25.39 ccw(c91.748,25.908) 92.329,25.908 ; K2.1@92.329,24.765 92.329,25.908 ; K2.1@92.647,25.39 cw(c92.91,25.908) 92.329,25.908 ; v1@99.099,52.793 99.187,52.705 v1(99.187,52.578) ; P23.1@100.838,85.992 cw(c100.241,85.217) 101.219,85.217 ; P23.1@100.99,86.19 cw(c100.632,85.725) 101.219,85.725 cw(c101.806,85.725) P23.1@101.448,86.19 ; P23.1@101.219,86.487 101.219,85.217 ; P23.1@101.6,85.992 ccw(c102.197,85.217) 101.219,85.217 ; v1(102.362,74.295) 109.093,74.295 110.49,75.692 118.11,75.692 ; v1@102.521,74.136 cw(c102.905,73.752) 102.905,74.295 cw(c102.905,74.838) v1@102.521,74.454 ; 103.696,34.787 ccw(c103.696,35.369) v1@104.108,34.957 ; 103.751,34.787 cw(c103.751,34.282) v1@104.108,34.639 ; P19.1@106.934,36.83 108.585,36.83 ; P19.1@107.076,36.442 cw(c107.994,35.551) 107.994,36.83 ; P19.1@107.249,37.145 ccw(c108.009,37.905) 108.009,36.83 ; P19.1@107.255,36.268 cw(c108.585,34.977) 108.585,36.83 ; v1@109.823,96.425 ccw(c109.439,96.809) 109.982,96.809 ccw(c110.525,96.809) v1@110.141,96.425 ; v1@109.823,98.52 cw(c109.439,98.136) 109.982,98.136 cw(c110.525,98.136) v1@110.141,98.52 ; v1(109.982,96.266) v1(109.982,98.679) ; 112.287,27.559 cw(c112.287,25.149) R21.1@113.991,26.853 ; 112.891,27.559 cw(c112.891,25.753) R21.1@114.168,27.03 ; 113.494,27.559 cw(c113.494,26.356) R21.1@114.345,27.207 ; R21.1@114.091,27.525 ccw(c113.28,28.336) 114.427,28.336 ccw(c115.574,28.336) R21.1@114.763,27.525 ; R21.1@114.427,27.189 116.978,27.189 120.142,30.353 v1(120.142,39.37) ; R37.2@114.499,33.562 ccw(c113.688,32.751) 113.688,33.898 ccw(c113.688,35.045) R37.2@114.499,34.234 ; R37.2@114.599,33.562 cw(c113.788,32.751) 114.935,32.751 cw(c116.082,32.751) R37.2@115.271,33.562 ; R21.1@114.863,26.853 cw(c115.674,26.042) 115.674,27.189 cw(c115.674,28.336) R21.1@114.863,27.525 ; R37.2@115.371,33.562 cw(c116.182,32.751) 116.182,33.898 cw(c116.182,35.045) R37.2@115.371,34.234 ; 116.291,33.898 ccw(c116.291,35.082) R1.1@117.128,34.245 ; 116.344,33.898 cw(c116.344,32.789) R1.1@117.128,33.573 ; R1.1@117.453,33.898 R37.2@114.935,33.898 ; v1@117.951,74.2 ccw(c117.567,74.584) 118.11,74.584 ccw(c118.653,74.584) 118.269,74.2 ccw(c118.653,74.584) 118.653,74.041 ccw(c118.653,73.498) v1@118.269,73.882 ; v1@117.951,88.233 cw(c117.567,87.849) 118.11,87.849 cw(c118.653,87.849) v1@118.269,88.233 ; v1(118.11,88.392) 118.11,75.692 ; v1@118.967,47.403 ccw(c118.583,47.787) 119.126,47.787 ccw(c119.669,47.787) v1@119.285,47.403 ; v1(119.126,47.244) 119.126,56.134 121.657,58.665 121.657,69.798 121.666,69.806 121.666,72.136 119.761,74.041 v1(118.11,74.041) 118.11,75.692 ; v1@119.983,39.211 cw(c119.599,38.827) 120.142,38.827 cw(c120.685,38.827) v1@120.301,39.211 ; 29.083,77.597 28.448,76.962 28.448,66.04 29.464,65.024 ; 32.258,65.024 31.877,64.643 31.877,51.054 32.893,50.038 ; 92.329,25.908 93.98,27.559 114.427,27.559 114.427,29.464 114.935,29.972 R37.2@114.935,33.898 ; 108.585,36.83 111.517,33.898 R37.2@114.935,33.898
VCC5V: C3.2 C22.2 C30.2 C31.2 F1.1 J3.4 P22.1 P22.2 P22.3 P22.4 U2.3 U7.3 U8.16 | length 369.4
  Top Layer w0.25: P22.4@30.607,61.976 P22.3@33.147,61.976 P22.2@35.687,61.976 P22.1@38.227,61.976 ; v1(30.734,101.727) 31.943,101.727 33.107,102.891 37.105,102.891 39.222,105.008 39.222,111.273 38.735,111.76 ; P22.4@30.872,61.711 cw(c31.512,61.071) 31.512,61.976 cw(c31.512,62.881) P22.4@30.872,62.241 ; v1@30.893,101.568 cw(c31.277,101.184) 31.277,101.727 cw(c31.277,102.27) v1@30.893,101.886 ; P22.4@31.049,61.534 cw(c32.116,60.467) 32.116,61.976 cw(c32.116,63.485) P22.4@31.049,62.418 ; P22.3@32.705,61.534 ccw(c31.638,60.467) 31.638,61.976 ccw(c31.638,63.485) P22.3@32.705,62.418 ; P22.3@32.882,61.711 ccw(c32.242,61.071) 32.242,61.976 ccw(c32.242,62.881) P22.3@32.882,62.241 ; P22.3@33.412,61.711 cw(c34.052,61.071) 34.052,61.976 cw(c34.052,62.881) P22.3@33.412,62.241 ; P22.3@33.589,61.534 cw(c34.656,60.467) 34.656,61.976 cw(c34.656,63.485) P22.3@33.589,62.418 ; P22.2@35.245,61.534 ccw(c34.178,60.467) 34.178,61.976 ccw(c34.178,63.485) P22.2@35.245,62.418 ; P22.2@35.422,61.711 ccw(c34.782,61.071) 34.782,61.976 ccw(c34.782,62.881) P22.2@35.422,62.241 ; U2.3@35.909,108.124 cw(c35.525,107.74) 36.068,107.74 cw(c36.611,107.74) U2.3@36.227,108.124 ; P22.2@35.952,61.711 cw(c36.592,61.071) 36.592,61.976 cw(c36.592,62.881) P22.2@35.952,62.241 ; U2.3@36.068,109.183 36.068,107.569 36.576,107.061 37.338,107.061 38.227,107.95 v1(38.227,111.76) 38.735,111.76 ; P22.2@36.129,61.534 cw(c37.196,60.467) 37.196,61.976 cw(c37.196,63.485) P22.2@36.129,62.418 ; P22.1@37.785,61.534 ccw(c36.718,60.467) 36.718,61.976 ccw(c36.718,63.485) P22.1@37.785,62.418 ; P22.1@37.962,61.711 ccw(c37.322,61.071) 37.322,61.976 ccw(c37.322,62.881) P22.1@37.962,62.241 ; v1@38.068,111.601 cw(c37.684,111.217) 38.227,111.217 cw(c38.77,111.217) v1@38.386,111.601 ; v1@38.394,111.609 cw(c38.735,111.299) 38.735,111.76 ; v1@38.394,111.911 ccw(c38.735,112.221) 38.735,111.76 ; v1(39.116,114.681) 41.148,114.681 41.91,113.919 v1(57.912,113.919) ; v1@39.275,114.522 cw(c39.659,114.138) 39.659,114.681 cw(c39.659,115.224) v1@39.275,114.84 ; v1@56.356,26.194 ccw(c55.972,26.578) 56.515,26.578 ccw(c57.058,26.578) v1@56.674,26.194 ; v1@56.356,28.162 cw(c55.972,27.778) 56.515,27.778 cw(c57.058,27.778) v1@56.674,28.162 ; v1(56.515,26.035) v1(56.515,28.321) ; v1@57.753,113.76 ccw(c57.369,113.376) 57.369,113.919 ccw(c57.369,114.462) v1@57.753,114.078 ; v1@59.531,28.48 ccw(c59.147,28.864) 59.69,28.864 ccw(c60.233,28.864) v1@59.849,28.48 ; v1@59.531,30.575 cw(c59.147,30.191) 59.69,30.191 cw(c60.233,30.191) v1@59.849,30.575 ; v1(59.69,28.321) v1(59.69,30.734) ; v1(66.294,35.941) 69.85,35.941 70.612,36.703 74.041,36.703 ; v1@66.453,35.782 cw(c66.837,35.398) 66.837,35.941 cw(c66.837,36.484) v1@66.453,36.1 ; J3.4@73.501,33.306 ccw(c72.197,34.61) 74.041,34.61 ccw(c75.885,34.61) J3.4@74.581,33.306 ; J3.4@73.678,33.129 ccw(c72.8,34.007) 74.041,34.007 ccw(c75.282,34.007) J3.4@74.404,33.129 ; J3.4@74.041,32.385 74.041,36.703 ; C22.2@74.041,38.724 74.041,36.703 ; v1@86.233,108.741 cw(c86.233,108.198) 86.617,108.582 cw(c87.001,108.966) v1@86.458,108.966 ; v1(86.233,108.966) 88.011,107.188 ; v1@87.86,106.847 ccw(c87.55,107.188) 88.011,107.188 ; v1(88.011,106.68) 88.011,107.188 ; v1@88.162,106.847 cw(c88.472,107.188) 88.011,107.188 ; v1@112.363,109.315 cw(c111.979,108.931) 112.522,108.931 cw(c113.065,108.931) v1@112.681,109.315 ; v1(112.522,109.474) 112.522,108.204 116.291,104.435 ; v1(113.03,102.108) F1.1@116.164,102.108 ; v1@113.189,101.949 cw(c113.573,101.565) 113.573,102.108 cw(c113.573,102.651) v1@113.189,102.267 ; v1@113.268,102.108 cw(c113.268,98.958) F1.1@115.496,101.186 ; v1(113.665,113.03) 113.679,113.044 U7.3@116.786,113.044 ; v1@113.824,112.871 cw(c114.242,112.453) 114.242,113.044 ; v1@113.824,113.189 ccw(c114.174,113.539) 114.174,113.044 ; 113.872,102.108 cw(c113.872,99.562) F1.1@115.672,101.362 ; 113.882,102.108 ccw(c113.882,104.39) F1.1@115.496,102.776 ; 114.476,102.108 cw(c114.476,100.166) F1.1@115.849,101.539 ; 114.485,102.108 ccw(c114.485,103.787) F1.1@115.672,102.6 ; F1.1@115.496,100.636 cw(c114.089,99.229) 116.078,99.229 ; F1.1@115.672,100.812 cw(c114.693,99.833) 116.078,99.833 ; C30.2@115.742,96.232 ccw(c114.931,97.043) 116.078,97.043 ccw(c117.225,97.043) C30.2@116.414,96.232 ; F1.1@115.748,103.516 ccw(c115.242,104.435) 116.291,104.435 ; F1.1@115.869,103.297 ccw(c115.475,104.012) 116.291,104.012 ccw(c117.107,104.012) F1.1@116.713,103.297 ; 116.078,98.201 cw(c119.521,98.201) F1.1@117.087,100.636 ; 116.078,98.804 cw(c118.918,98.804) F1.1@116.91,100.812 ; 116.078,99.408 cw(c118.314,99.408) F1.1@116.733,100.989 ; 116.078,100.011 cw(c117.711,100.011) F1.1@116.556,101.166 ; F1.1@116.078,101.768 C30.2@116.078,95.896 120.904,95.896 C31.2@121.031,95.769 ; U7.3@116.26,112.744 ccw(c115.535,112.018) 115.535,113.044 ccw(c115.535,114.07) U7.3@116.26,113.345 ; F1.1@116.291,101.981 116.291,104.435 ; C30.2@116.514,95.56 cw(c117.325,94.749) 117.325,95.896 cw(c117.325,97.043) C30.2@116.514,96.232 ; F1.1@116.834,103.516 cw(c117.34,104.435) 116.291,104.435 ; 119.478,95.896 cw(c119.478,94.316) C31.2@120.595,95.433 ; 120.081,95.896 cw(c120.081,94.919) C31.2@120.772,95.61 ; 120.091,95.896 ccw(c120.091,96.609) C31.2@120.595,96.105
  Bottom Layer w0.25: P22.4@30.049,61.694 ccw(c29.591,61.463) 29.591,61.976 ; P22.4@30.049,62.258 cw(c29.591,62.489) 29.591,61.976 ; P22.4@30.165,61.534 cw(c29.098,60.467) 30.607,60.467 cw(c32.116,60.467) P22.4@31.049,61.534 ; P22.4@30.342,61.711 cw(c29.702,61.071) 30.607,61.071 cw(c31.512,61.071) P22.4@30.872,61.711 ; v1@30.575,101.568 ccw(c30.191,101.184) 30.191,101.727 ccw(c30.191,102.27) v1@30.575,101.886 ; v1(30.734,101.727) 29.845,101.727 27.94,99.822 27.94,63.627 29.591,61.976 ; C3.2@35.997,112.196 ccw(c35.186,113.007) 36.333,113.007 ccw(c37.48,113.007) C3.2@36.669,112.196 ; C3.2@36.669,111.424 cw(c37.48,110.613) 37.48,111.76 cw(c37.48,112.907) C3.2@36.669,112.096 ; v1@38.068,111.601 ccw(c37.684,111.217) 37.684,111.76 ccw(c37.684,112.303) v1@38.068,111.919 ; v1(38.227,111.76) C3.2@36.333,111.76 36.333,113.041 37.973,114.681 v1(39.116,114.681) ; v1@38.957,114.522 ccw(c38.573,114.138) 38.573,114.681 ccw(c38.573,115.224) v1@38.957,114.84 ; v1(56.515,26.035) 56.134,25.654 50.292,25.654 30.607,45.339 P22.4@30.607,61.976 29.591,61.976 ; v1(56.515,28.321) v1(59.69,28.321) ; v1@56.674,28.162 cw(c57.058,27.778) 57.058,28.321 cw(c57.058,28.864) v1@56.674,28.48 ; v1(57.912,113.919) 75.057,113.919 77.089,111.887 83.312,111.887 v1(86.233,108.966) ; v1@58.071,113.76 cw(c58.455,113.376) 58.455,113.919 cw(c58.455,114.462) v1@58.071,114.078 ; v1@59.531,28.162 ccw(c59.147,27.778) 59.147,28.321 ccw(c59.147,28.864) v1@59.531,28.48 ; v1(59.69,30.734) 61.087,30.734 v1(66.294,35.941) ; v1@59.849,30.575 cw(c60.233,30.191) 60.233,30.734 cw(c60.233,31.277) v1@59.849,30.893 ; v1@66.069,35.941 cw(c65.526,35.941) 65.91,35.557 cw(c66.294,35.173) v1@66.294,35.716 ; v1@86.008,108.966 ccw(c85.465,108.966) 85.849,109.35 ccw(c86.233,109.734) v1@86.233,109.191 ; v1@88.011,106.455 cw(c88.011,105.912) 88.395,106.296 cw(c88.779,106.68) v1@88.236,106.68 ; v1(88.011,106.68) 91.059,103.632 96.647,103.632 ; U8.16@96.647,105.373 96.647,103.632 ; v1@112.363,109.633 ccw(c111.979,110.017) 112.522,110.017 ccw(c113.065,110.017) v1@112.681,109.633 ; v1(112.522,109.474) 112.522,111.887 v1(113.665,113.03) ; v1@112.871,101.949 ccw(c112.487,101.565) 112.487,102.108 ccw(c112.487,102.651) v1@112.871,102.267 ; v1(113.03,102.108) 111.379,102.108 110.49,101.219 98.425,101.219 96.647,102.997 96.647,103.632 ; v1@113.44,113.03 cw(c112.897,113.03) 113.281,112.646 cw(c113.665,112.262) v1@113.665,112.805
pads on no net: J2.5 J2.6 J2.7 J3. J3.2 J3.6 J4.5 J4.6 J4.7 J5.5 J5.6 J5.7 K2.3 K2.4 K3.3 K3.4 K4.3 K4.4 RST.3 RST.4 SD1.10 SD1.11 SD2.8 SD2.9 SD2.10 SD2.11 SD2.12 SD2.13 SD2.14 SD2.15 SD2.16 SD2.17 U2.5 U8.9 U8.10 U8.11 U8.12 U8.15 U9.2 U9.3 U9.4 U9.11 U9.12 U9.13 U9.14 U9.16 U9.17 U9.18 U9.19 U9.28 U9.29 U9.38 U9.39 U9.40

## Polygon pours and split planes (outlines as drawn)
GND on Top Layer "GND" (solid, pour order 0): 28.956,122.174 28.978,122.152 122.806,122.152 123.72,122.152 124.587,121.285 125.603,120.269 125.603,119.888 125.603,118.618 125.73,118.491 125.73,25.654 125.73,24.384 125.349,24.003 124.206,22.86 123.952,22.86 123.571,22.479 28.829,22.479 27.813,22.479 27.305,22.987 26.162,24.13 26.162,24.638 26.162,26.162 26.035,26.289 26.035,119.253 26.035,120.269 26.416,120.65 27.432,121.666 28.448,121.666 28.956,122.174
GND on Bottom Layer "GND" (solid, pour order 1): 28.958,122.152 28.959,122.152 122.806,122.152 123.847,122.152 125.222,120.777 125.73,120.269 125.73,118.999 125.73,24.892 125.73,24.511 123.825,22.606 123.698,22.479 28.829,22.479 27.94,22.479 26.543,23.876 26.035,24.384 26.035,25.654 26.035,120.142 26.289,120.396 27.178,121.285 27.178,121.539 27.686,121.539 28.321,122.174 28.343,122.152 28.958,122.152

## Keep-outs
Keep-Out Layer:
  lines w0.254: 26.035,25.366 26.035,119.253 ; 26.051,25.366 ccw(c29.332,25.743) 28.829,22.479 122.555,22.479 ccw(c122.555,25.654) 125.73,25.654 125.73,118.491 ; 26.054,119.251 cw(c29.335,118.872) 28.958,122.152 ; 28.956,122.174 122.806,122.174 ; 122.806,122.152 cw(c122.428,118.872) 125.708,118.494

## Other copper
Top Layer:
  region net GND: 74.359,70.041 78.74,74.422 74.74,78.422 70.358,74.041
  rectangle net GND: 93.98,46.736 98.933,51.689
  region: 74.041,37.211 73.533,36.703 74.041,36.195
  region: 83.185,95.758 82.804,95.377 82.804,96.012
  region: 82.804,96.266 82.804,96.012 83.058,95.758
  region: 81.555,105.135 82.169,104.521 81.555,103.907
  region: 87.731,68.479 87.731,67.844 87.818,67.757 88.453,67.757
  region: 52.578,93.091 53.086,92.583 53.086,92.456 52.578,91.948
  region: 122.047,104.902 122.555,104.394 123.063,104.902
  region: 116.586,85.852 116.078,85.344 117.221,85.344
  region: 73.914,107.569 74.422,107.061 73.914,106.553
  region: 93.726,44.958 93.345,44.577 93.726,44.196
  region: 100.965,52.324 100.711,52.07 101.473,52.07
  region: 89.789,75.068 90.17,74.687 90.551,75.068
  region: 105.029,42.926 105.537,42.418 106.045,42.926
  region: 47.106,39.254 47.461,38.899 47.524,38.899 47.106,38.481
  region: 53.975,41.275 54.483,40.767 54.483,40.64 53.975,40.132
  region: 35.041,89.281 35.179,89.281 35.56,88.9 35.052,88.392 35.041,88.392
  region: 61.001,25.74 60.579,25.318 60.579,25.273 61.722,25.273
Bottom Layer:
  region net GND: 74.358,70.041 78.74,74.422 74.739,78.422 70.358,74.041
  region net VCC: 75.756,78.296 80.201,73.85 81.153,74.803 76.708,79.248
  region net VCC: 80.708,75.247 73.978,68.517 74.987,67.507 81.718,74.238
  region net VCC: 75.438,67.945 68.39,74.994 67.374,73.977 74.422,66.929
  region net VCC: 68.39,72.961 75.121,79.692 74.047,80.766 67.316,74.035
  rectangle net GND: 93.98,46.736 98.933,51.689
  rectangle net VCC: 92.583,52.197 100.33,53.594
  region net VCC: 93.345,45.847 93.345,53.594 92.075,53.594 92.075,45.847
  region net VCC: 99.822,46.228 92.075,46.228 92.075,44.958 99.822,44.958
  region net VCC: 99.695,49.487 99.695,44.958 100.965,44.958 100.965,49.487
  region: 96.647,104.013 96.266,103.632 96.647,103.251
  region: 57.672,44.436 58.166,43.942 57.672,43.448
  region: 118.11,76.2 117.602,75.692 118.11,75.184
  region: 36.714,82.539 37.084,82.169 36.714,81.799
  region: 43.053,52.959 42.418,52.959 43.053,52.324
  region: 48.26,50.927 48.26,50.419 48.768,50.927
  region: 81.788,35.306 81.534,35.052 82.804,35.052
  region: 81.788,35.306 81.534,35.052
  region: 81.788,35.306 80.772,35.052 81.788,35.052

## Silkscreen, mask and mechanical layers (free items; w line width, h text height)
Top Overlay:
  lines w0.254: 102.743,95.377 103.632,95.377 103.632,94.234 ; 102.87,85.344 103.505,85.344 103.632,85.471 103.632,86.487 ; 113.538,97.79 113.792,97.536 113.792,98.044 113.538,97.79
  text "RST" at 38.735,120.142 h2.03
  text "TXD" at 71.755,120.142 h2.03
  text "SWDIO" at 75.311,119.634 h2.03 r270
  text "ESP" at 91.186,119.126 h2.03
  text "3V3" at 79.502,117.729 h2.03
  text "8266" at 90.805,117.729 h2.03
  text "ADC" at 38.608,117.475 h2.03
  text "RXD" at 71.755,117.348 h2.03
  text "TJA1050" at 32.512,115.951 h2.03
  text "STM32" at 91.313,115.697 h2.03
  text "GND" at 79.502,115.062 h2.03
  text "EN" at 40.005,114.681 h2.03
  text "IO5" at 71.755,114.681 h2.03
  text "USB-USART" at 115.316,114.554 h2.03
  text "ESP8266" at 51.943,113.919 h3.05
  text "CH340" at 91.313,113.157 h2.03
  text "SWD" at 79.502,112.522 h2.03
  text "IO16" at 38.608,112.395 h2.03
  text "IO4" at 71.628,112.395 h2.03
  text "12M" at 104.013,112.141 h2.03
  text "TX" at 85.725,110.998 h2.03
  text "RX" at 88.773,110.998 h2.03
  text "ESP12F" at 52.324,110.871 h3.05
  text "L" at 26.543,110.744 h2.03
  text "SCL" at 79.502,110.109 h2.03
  text "IO14" at 38.481,109.728 h2.03
  text "IO0" at 71.628,109.601 h2.03
  text "usart" at 82.931,108.712 h2.54
  text "H" at 26.416,108.077 h2.03
  text "IO12" at 38.354,107.188 h2.03
  text "IO2" at 71.628,107.188 h2.03
  text "GND" at 79.375,106.426 h2.03
  text "3V3" at 85.979,106.426 h2.03
  text "CAN" at 26.924,106.045 h2.03
  text "AMS1117-3.3" at 107.569,105.918 h2.03
  text "IO13" at 38.354,104.775 h2.03
  text "IO15" at 71.628,104.648 h2.03
  text "SDA" at 79.375,103.886 h2.03
  text "TX" at 85.852,103.886 h2.03
  text "8550" at 89.535,102.362 h2.03
  text "3V3" at 38.481,102.235 h2.03
  text "GND" at 71.628,102.108 h2.03
  text "SCL" at 79.375,101.346 h2.03
  text "RX" at 85.852,101.346 h2.03
  text "500" at 122.682,101.092 h2.03
  text "IIC" at 74.93,100.838 h2.54 r270
  text "mA" at 122.809,99.822 h2.03
  text "SMB" at 79.375,98.806 h2.03
  text "GND" at 85.852,98.806 h2.03
  text "1N4148" at 109.474,98.806 h2.03 r270
  text "PA12" at 87.503,98.679 h1.91 r270
  text "PA11" at 89.916,98.679 h1.91 r270
  text "PA10" at 92.456,98.679 h1.91 r270
  text "PB9" at 60.706,97.79 h1.91 r270
  text "PB8" at 63.119,97.79 h1.91 r270
  text "PB7" at 65.659,97.79 h1.91 r270
  text "PB6" at 68.199,97.79 h1.91 r270
  text "PB5" at 70.993,97.79 h1.91 r270
  text "PB4" at 73.406,97.79 h1.91 r270
  text "PB3" at 75.946,97.79 h1.91 r270
  text "A15" at 79.756,97.79 h1.91 r270
  text "A14" at 82.296,97.79 h1.91 r270
  text "A13" at 84.836,97.79 h1.91 r270
  text "PA9" at 94.996,97.79 h1.91 r270
  text "PA8" at 97.536,97.79 h1.91 r270
  text "8050" at 99.822,97.79 h2.03
  text "IO10" at 53.213,97.409 h2.03 r270
  text "CS0" at 45.466,97.282 h2.03 r270
  text "MISO" at 48.133,97.282 h2.03 r270
  text "IO9" at 50.546,97.282 h2.03 r270
  text "MOSI" at 55.753,97.282 h2.03 r270
  text "SCLK" at 58.293,97.282 h2.03 r270
  text "VCC-3.3V" at 102.997,93.98 h2.03 r270
  text "PB9" at 60.579,89.027 h1.91 r270
  text "PB8" at 62.992,89.027 h1.91 r270
  text "PB7" at 65.532,89.027 h1.91 r270
  text "PB6" at 68.072,89.027 h1.91 r270
  text "PB5" at 70.866,89.027 h1.91 r270
  text "PB4" at 73.279,89.027 h1.91 r270
  text "PB3" at 75.819,89.027 h1.91 r270
  text "A15" at 79.629,89.027 h1.91 r270
  text "A14" at 82.169,89.027 h1.91 r270
  text "A13" at 84.709,89.027 h1.91 r270
  text "PA12" at 87.249,89.027 h1.91 r270
  text "PA11" at 89.662,89.027 h1.91 r270
  text "PA10" at 92.329,89.027 h1.91 r270
  text "PA9" at 94.869,89.027 h1.91 r270
  text "PA8" at 97.409,89.027 h1.91 r270
  text "PC6" at 48.641,87.376 h1.91 r270
  text "PC7" at 50.927,87.376 h1.91 r270
  text "PC8" at 53.467,87.376 h1.91 r270
  text "PC9" at 55.88,87.376 h1.91 r270
  text "PD2" at 39.718,85.25 h1.91
  text "X" at 37.592,82.964 h2.03
  text "FLASH" at 27.686,82.931 h2.03
  text "0" at 34.29,82.931 h2.03
  text "PC13" at 39.37,82.677 h1.78
  text "PC13" at 48.514,82.55 h1.78
  text "I2S" at 104.267,82.55 h2.03
  text "ISP" at 28.829,81.661 h2.03
  text "1" at 34.29,81.661 h2.03
  text "0" at 37.719,81.661 h2.03
  text "PB15" at 88.519,81.407 h1.91
  text "PB15" at 98.171,81.407 h1.91
  text "SDIN" at 106.934,80.899 h2.03
  text "PC12" at 39.37,80.518 h1.78
  text "SRAM" at 27.813,80.391 h2.03
  text "1" at 34.29,80.391 h2.03
  text "1" at 37.719,80.391 h2.03
  text "PC12" at 48.387,79.756 h1.78
  text "USB-stm32" at 116.332,79.502 h2.03
  text "1" at 30.988,79.121 h2.03
  text "BT0" at 34.036,79.121 h2.03
  text "BT1" at 37.465,79.121 h2.03
  text "PB14" at 88.519,78.867 h1.91
  text "PB14" at 98.171,78.867 h1.91
  text "PC11" at 39.37,77.851 h1.78
  text "PC11" at 48.514,77.724 h1.78
  text "SCLK" at 106.807,77.724 h2.03
  text "BOOT0" at 27.432,77.597 h2.03 r270
  text "BOOT1" at 34.29,77.47 h2.03 r270
  text "STM32" at 72.009,76.581 h2.03
  text "PB13" at 88.646,76.327 h1.91
  text "PB13" at 98.298,76.327 h1.91
  text "PC10" at 39.37,75.184 h1.78
  text "LRCK" at 106.934,75.184 h2.03
  text "PC10" at 48.514,75.057 h1.78
  text "GD32" at 72.39,74.168 h2.03
  text "B12" at 89.789,73.787 h1.91
  text "PB12" at 98.298,73.787 h1.91
  text "MCLK" at 106.934,72.898 h2.03
  text "PC5" at 39.751,72.644 h1.91
  text "PC5" at 48.641,72.517 h1.91
  text "F103Rxxx" at 70.485,72.009 h2.03
  text "PC6" at 106.934,71.755 h2.03
  text "B11" at 89.662,71.247 h1.91
  text "PB11" at 98.298,71.247 h1.91
  text "PC4" at 39.751,70.358 h1.91
  text "PC4" at 48.641,70.231 h1.91
  text "GND" at 27.813,69.977 h1.91 r270
  text "0" at 30.607,69.723 h2.03
  text "PB10" at 88.646,68.707 h1.91
  text "PB10" at 98.298,68.58 h1.91
  text "CS4344" at 111.252,68.072 h2.03
  text "PC3" at 39.751,67.691 h1.91
  text "PC3" at 48.641,67.564 h1.91
  text "3V3" at 27.813,66.421 h2.03 r270
  text "PB2" at 98.298,66.167 h1.91
  text "PB2" at 89.662,66.04 h1.91
  text "PC2" at 39.751,65.151 h1.91
  text "PC2" at 48.641,65.024 h1.91
  text "PB1" at 89.662,63.754 h1.91
  text "PB1" at 98.298,63.5 h1.91
  text "PC1" at 39.751,62.611 h1.91
  text "PC1" at 48.641,62.484 h1.91
  text "8M" at 63.119,62.23 h2.03
  text "PB0" at 91.44,61.976 h1.91 r270
  text "PB0" at 98.425,61.468 h1.91
  text "PA5" at 78.867,60.833 h1.91 r270
  text "PA6" at 81.407,60.833 h1.91 r270
  text "PA7" at 83.947,60.833 h1.91 r270
  text "PA0" at 65.786,60.706 h1.91 r270
  text "PA1" at 68.707,60.706 h1.91 r270
  text "PA2" at 71.247,60.706 h1.91 r270
  text "PA3" at 73.787,60.706 h1.91 r270
  text "PA4" at 76.327,60.706 h1.91 r270
  text "5V" at 26.924,60.325 h2.03
  text "PC0" at 39.624,59.944 h1.91
  text "PC0" at 48.514,59.817 h1.91
  text "IRQ" at 29.464,57.023 h2.03
  text "MISO" at 38.354,57.023 h2.03
  text "8M" at 95.631,56.769 h2.03
  text "VOICE" at 118.491,55.626 h2.03
  text "MOSI" at 28.067,54.483 h2.03
  text "SCK" at 38.227,54.483 h2.03
  text "NRF24L01" at 41.783,52.451 h2.03
  text "CE" at 38.227,51.943 h2.03
  text "CS" at 30.099,51.816 h2.03
  text "PA5" at 78.867,51.816 h1.91 r270
  text "PA6" at 81.407,51.816 h1.91 r270
  text "PA7" at 83.947,51.816 h1.91 r270
  text "PA0" at 65.786,51.689 h1.91 r270
  text "PA1" at 68.707,51.689 h1.91 r270
  text "PA2" at 71.247,51.689 h1.91 r270
  text "PA3" at 73.787,51.689 h1.91 r270
  text "PA4" at 76.327,51.689 h1.91 r270
  text "G" at 86.36,50.673 h2.03
  text "stm32" at 93.726,50.546 h2.03
  text "GND" at 38.227,49.403 h2.03
  text "3V3" at 29.21,49.276 h2.03
  text "f103" at 94.488,49.022 h2.03
  text "T" at 86.487,48.133 h2.03
  text "c8t6" at 94.488,47.244 h2.03
  text "GND" at 68.326,46.355 h2.03
  text "DAC" at 72.771,46.355 h2.03
  text "R" at 86.487,45.593 h2.03
  text "SWC" at 99.187,44.069 h2.03
  text "SWD" at 99.187,40.767 h2.03
  text "USB-stlink" at 116.967,38.989 h2.03
  text "GND" at 99.314,38.608 h2.03
  text "SWD" at 92.075,37.592 h0.89
  text "SWC" at 94.996,37.592 h0.89
  text "3V3" at 101.092,37.465 h2.03 r270
  text "LED5050" at 35.814,35.687 h2.03
  text "FLASH" at 56.261,35.56 h2.03
  text "NRST" at 104.013,33.782 h2.03
  text "GND" at 97.79,33.147 h0.89
  text "SWIM" at 104.013,32.512 h2.03
  text "POWER" at 113.284,27.178 h2.03
  text "Designed by. r3z4" at 33.274,24.765 h3 r0.26
  text "PS2" at 64.008,24.13 h2.03
Bottom Overlay:
  text "USB-stlink" at 119.634,48.387 h2.03 r90